# Altium PCB 光耦转接板.PcbDoc
Units mm, origin at the board's own origin, x right, y up, seen from the top; angles counter-clockwise.
Board outline 19.05 x 14.22 mm, 2 copper layers (Top Layer, Bottom Layer); 15 components, 10 nets, 36 pads, 17 vias.
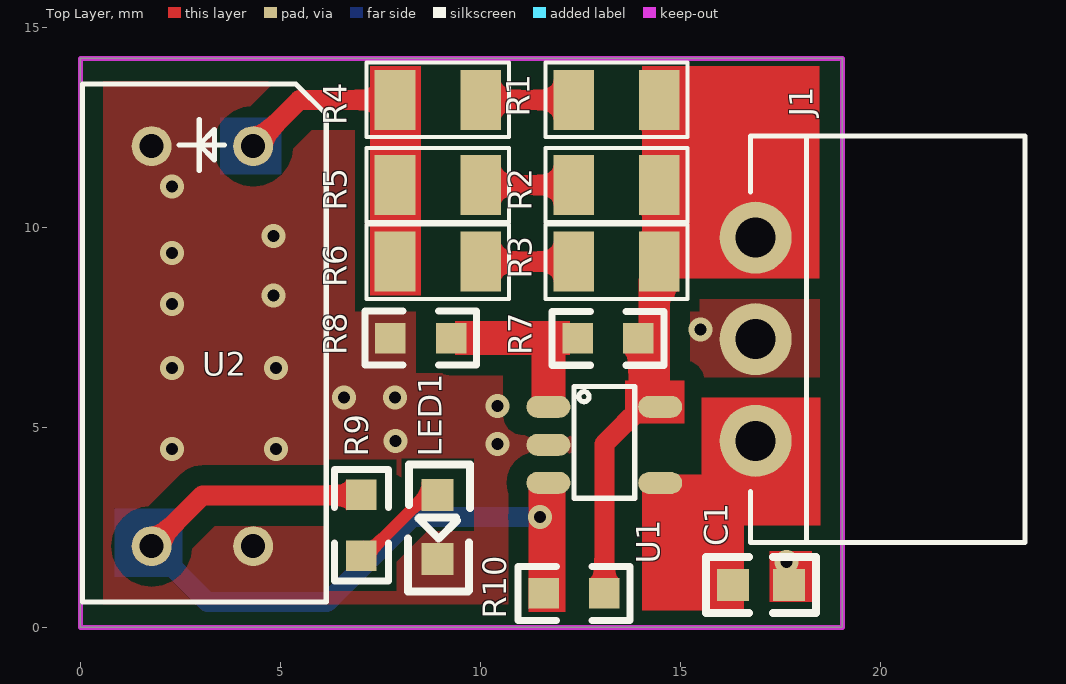
[diagram p0: Top Layer view]
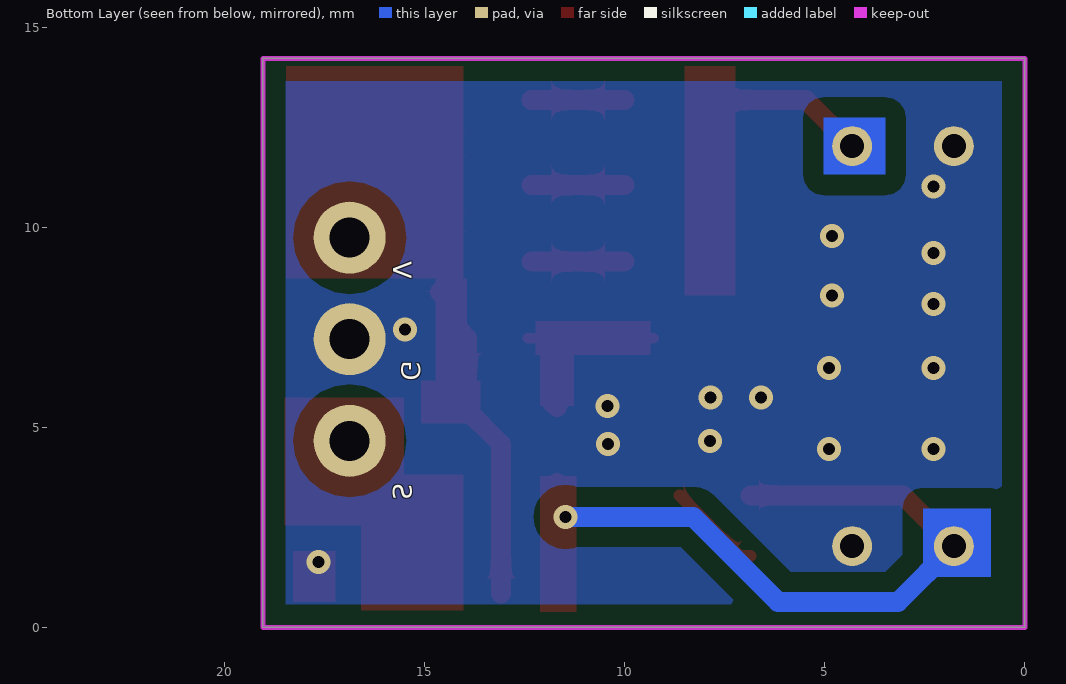
[diagram p1: Bottom Layer view, seen from below]
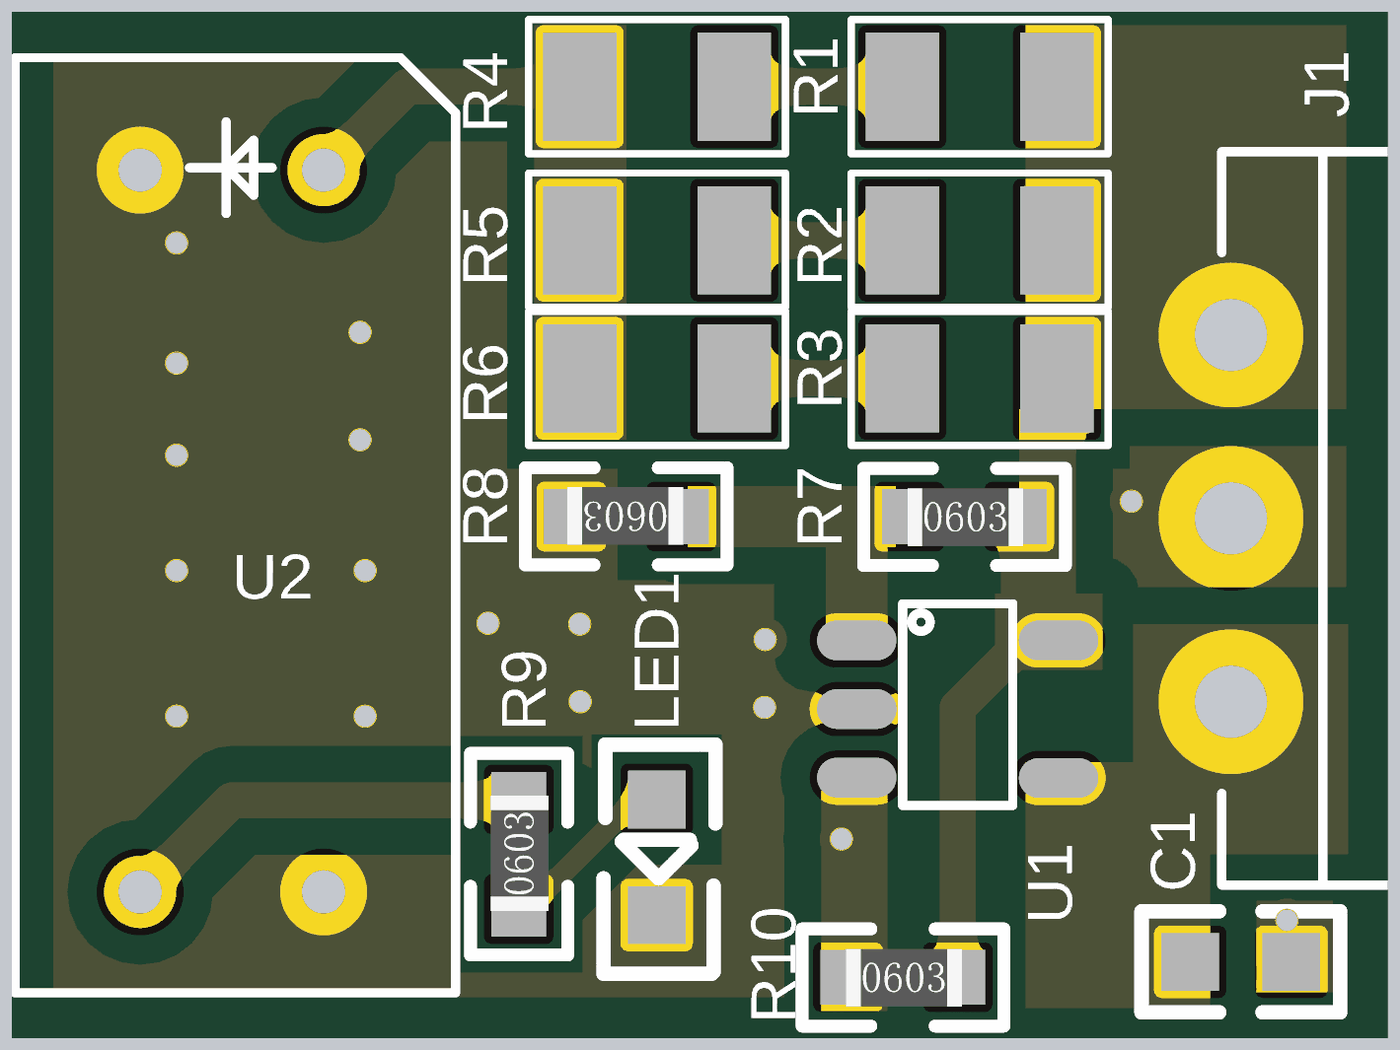
[diagram p2: 3D render of the assembled board from above, using the file's embedded part models]

## Layer stack, top to bottom
Top Solder: solder mask 0.0102, Solder Resist, Dk 3.5
Top Layer: signal copper 0.0356
Dielectric 1: dielectric 0.32, FR-4, Dk 4.8
Bottom Layer: signal copper 0.0356
Bottom Solder: solder mask 0.0102, Solder Resist, Dk 3.5

## Board outline
0,0 0,14.224 19.05,14.224 19.05,0

## Design rules (kind name [scope] priority, off if disabled: settings)
Clearance Clearance_1 [InPolygon] p1: gap=0.5 ignorepadtopadclearanceinfootprint=FALSE
Clearance [All] p2: gap=0.254 ignorepadtopadclearanceinfootprint=FALSE except(0: Arc-Hole Track-Hole SMDPad-Hole THPad-Hole Via-Hole Fill-Hole Poly-Hole Region-Hole Text-Hole)
PolygonConnect PolygonConnect_1 [All] p1: connectstyle=Direct reliefconductorwidth=0.254 reliefentries=4 polygonreliefangle="90 Angle" airgapwidth=0.254
PolygonConnect [InPadClass('u2_j1')] p2: connectstyle=Relief reliefconductorwidth=0.5 reliefentries=4 polygonreliefangle="90 Angle" airgapwidth=0.254
RoutingVias [All] p1: holewidth=0.711 width=1.27 viastyle="Through Hole" minholewidth=0.711 minwidth=1.27 maxholewidth=0.711 maxwidth=1.27
SolderMaskExpansion [All] p1: expansion=0.102
Width [All] p1: maxlimit=10 minlimit=0.5 preferedwidth=0.8
30 further rules are at their usual default settings.

## Classes and differential pairs
pad class u2_j1: J1-2 U2-2

## Components (designator, comment, footprint, x,y, rotation, side; value= is the part's Value field where it differs from the comment)
C1 "0.1uF/50V" C0603T 17.016,1.064 r180 top
J1 "3*1.27" XH2.54-3AW 23.61,2.127 r90 top
LED1 "LED" LED0603 8.933,2.552 r270 top
R1 "820R" R0805 13.4,13.187 r0 top value=10K
R2 "820R" R0805 13.4,11.06 r0 top value=10K
R3 "820R" R0805 13.4,9.146 r0 top value=10K
R4 "820R" R0805 8.933,13.187 r0 top value=10K
R5 "820R" R0805 8.933,11.06 r0 top value=10K
R6 "820R" R0805 8.933,9.146 r0 top value=10K
R7 "10k" R0603 13.187,7.232 r0 top value=10K
R8 "4.7K" R0603 8.508,7.232 r180 top value=10K
R9 "10k" R0603 7.019,2.552 r90 top value=10K
R10 "10k" R0603 12.337,0.851 r0 top value=10K
U1 "OP" SOT23-5 12.334,6.024 r270 top
U2 "ITR9608" ITR9608 0.048,13.589 r270 top

## Footprints (in the part's own frame and the unit in brackets; to place one, negate y for a bottom-side part, rotate by r counter-clockwise, add the part's x,y. Pads: shape width x height; smd on the part's side, far side on the other; paste and mask are expansions set on the pad)
C0603T [mm]
  rect 0.8x0.8 smd: 1(0.7,0) 2(-0.7,0)
  silkscreen extent -1.38,-0.7 1.38,0.7
ITR9608 [mm]
  round 1 hole 0.6: 1(1.557,4.27) 2(1.557,1.73) 3(11.557,1.73) 4(11.557,4.27)
  silkscreen extent 0,0 12.95,6.1
LED0603 [mm]
  rect 0.8x0.8 smd: 1(-0.759,-0.005) 2(0.841,-0.005)
  silkscreen extent -1.52,-0.74 1.65,0.81
R0603 [mil]
  rect 30x30 smd: 1(-29.92,0) 2(29.92,0)
  silkscreen extent -55,-27 55,26, body extent -31,-16 32,15, height 18
R0805 [mm]
  rect 1.016x1.5 smd: 1(-1.07,0) 2(1.07,0)
  silkscreen extent -1.78,-0.93 1.78,0.93, body extent -1,-0.62 1,0.63, height 0.5
SOT23-5 [mm]
  oval 0.55x1.1 smd: 1(0.508,-0.635) 2(1.458,-0.635) 3(2.408,-0.635) 4(2.413,2.159) 5(0.508,2.159)
  silkscreen extent 0,0 2.79,1.52
XH2.54-3AW [mm]
  round 1.8 hole 1: 1(7.62,6.731) 2(5.08,6.731) 3(2.54,6.731)
  silkscreen extent 0,0 10.16,6.86

## Part data
C1: library part CAP, "CAP MC SMD 50V 22pF J C0G 0603", MPN=GRM1885C1H220JA01D, Company=MURATA
J1: library part 3PIN_1.27
LED1: library part LED_1
R1 R2 R3 R4 R5 R6: library part Res1_2, "Resistor", LatestRevisionDate=17-Jul-2002, LatestRevisionNote="Re-released for DXP Platform.", PackageDescription="Axial Device, Thru-Hole; 2 Leads; 0.3 in Pin Spacing", PackageReference=AXIAL-0.3, Published=8-Jun-2000, Publisher="Altium Limited"
R7 R8 R9 R10: library part Res1, "Resistor", LatestRevisionDate=17-Jul-2002, LatestRevisionNote="Re-released for DXP Platform.", PackageReference=AXIAL-0.3, Published=8-Jun-2000, Publisher="Altium Limited"
U2: library part PHOTO-1, "PHOTOCOUPLER PS2701A 70V 30mA L rank SMD", MPN="PS2701A L rank", Company=NEC

## Via types
v1: diameter 0.6, hole 0.3, Top Layer to Bottom Layer, tented both sides, 17 vias

## Nets (pads, with @x,y where several pads share a name; then routed paths per layer and width w, separated by ;. In a path a pad name is that pad's centre, name@x,y a point inside that pad or via, vN(x,y) a via of type N, cw(c..) or ccw(c..) an arc to the next point about the centre after c; other vN are vias at no path point)
GND: C1.2 J1.2 LED1.2 R8.2 U1.2 U2.2 U2.4
  other v1: 17.654,1.641 2.282,4.467 4.892,4.467 10.422,4.589 7.87,4.667 10.431,5.53 7.863,5.743 6.594,5.755 2.282,6.484 4.892,6.484 15.5,7.444 2.282,8.083 4.822,8.295 2.282,9.359 4.822,9.784 2.282,11.023
NetLED1_1: LED1.1 R9.1 | length 2.4
  Top Layer w0.3: R9.1@6.858,1.78 7.112,1.78 LED1.1@8.631,3.299
NetR1_1: R1.1 R4.2 | length 2.3
  Top Layer w0.5: R4.2 R1.1
NetR2_1: R2.1 R5.2 | length 2.3
  Top Layer w0.5: R5.2 R2.1
NetR3_1: R3.1 R6.2 | length 2.3
  Top Layer w0.5: R6.2 R3.1
NetR4_1: R4.1 R5.1 R6.1 U2.1 | length 8.1
  Top Layer w0.5: U2.1 5.473,13.187 R4.1 R5.1 R6.1
SIG: C1.1 J1.3 U1.4 | length 3.3
  Top Layer w0.5: U1.4@14.732,3.371 14.732,2.071 15.74,1.064 C1.1
VDD: J1.1 R1.2 R2.2 R3.2 R7.2 R10.2 U1.5 | length 26.7
  Top Layer w0.5: R10.2 13.097,4.589 14.024,5.516 U1.5 13.947,6.061 ; 14.251,8.006 14.251,7.535 R7.2 ; 14.626,8.382 14.47,8.538 R3.2 ; 13.947,6.061 14.47,6.584 R3.2 ; 13.947,6.061 R7.2 ; R7.2 14.47,7.755 R3.2 ; R3.2 R2.2 ; R3.2 R2.2 ; R3.2 R2.2 ; R2.2 R1.2 ; R2.2 R1.2 ; R2.2 R1.2
VIN+: R9.2 R10.1 U1.3 U2.3 | length 19.3
  Top Layer w0.5: U2.3 3.046,3.3 R9.2@6.858,3.3 ; R10.1@11.486,1.185 v1(11.486,2.765) 11.699,2.978 U1.3
  Bottom Layer w0.5: U2.3 3.172,0.638 6.168,0.638 8.295,2.765 v1(11.486,2.765)
VOUT: R7.1 R8.1 U1.1
copper on no net: | length 12.7
  Top Layer w0.254: 9.268,7.232 12.428,7.232 ; 11.684,5.53 11.699,5.516 11.699,7.232 ; 11.899,5.516 11.911,5.528 ; 14.464,9.784 14.501,9.747 ; 14.47,9.146 16.378,9.146 16.803,9.571 ; 14.47,13.187 15.696,13.187 16.591,12.293 16.591,10.035 16.879,9.747
  Top Layer w0.5: 11.684,5.53 11.699,5.516

## Polygon pours and split planes (outlines as drawn)
GND on Top Layer "Top Layer-No Net" (solid, remove dead copper, pour order 4): -2.34,16.378 -2.34,-2.127 20.632,-2.127 21.908,-0.851 21.908,16.378
GND on Bottom Layer "Top Layer-No Net" (solid, remove dead copper, pour order 6): -2.34,16.378 -2.34,-1.914 -1.702,-2.552 20.845,-2.552 20.845,15.314 19.781,16.378

## Keep-outs
Keep-Out Layer:
  lines w0.127: 0,0 19.05,0 19.05,0.508 19.05,14.224 0,14.224 0,0

## Other copper
Top Layer:
  rectangle net NetR4_1: 7.232,8.295 8.508,14.038
  rectangle net GND: 17.229,0.638 18.292,1.914
  rectangle net VDD: 14.038,8.721 18.475,14.038
  rectangle net VOUT: 11.273,5.53 12.124,7.125
  rectangle net VOUT: 9.359,6.806 12.238,7.657
  rectangle net SIG: 15.527,2.552 18.505,5.743
  rectangle net VDD: 13.613,5.105 15.102,6.168
  rectangle net VDD: 13.947,5.318 14.732,7.535
  rectangle net SIG: 14.038,0.425 16.591,3.829
  rectangle net SIG: 15.953,0.638 16.591,5.105
  rectangle net VIN+: 11.206,0.383 12.124,3.786
  rectangle net VDD: 14.038,6.806 14.732,7.323
  rectangle net VDD: 13.947,6.806 14.732,8.721
Bottom Layer:
  rectangle net NetR4_1: 3.485,11.319 5.031,12.745
  rectangle net VIN+: 0.851,1.258 2.552,2.978

## Silkscreen, mask and mechanical layers (free items; w line width, h text height)
Bottom Overlay:
  text "V" at 15.953,8.721 h0.8 r90
  text "G" at 15.74,6.168 h0.8 r90
  text "S" at 15.953,3.19 h0.8 r90